# Altium PCB CustomTP4056Module_SMD.PcbDoc
Units mil, origin at the board's own origin, x right, y up, seen from the top; angles counter-clockwise.
Board outline 6000 x 4000 mil, 2 copper layers (Top Layer, Bottom Layer); 13 components, 10 nets, 33 pads, 3 vias.
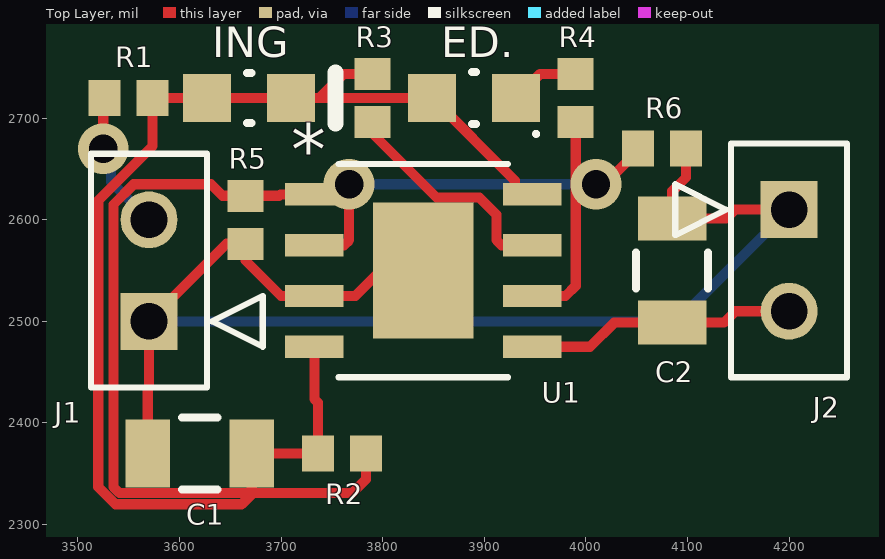
[diagram p0: Top Layer view]
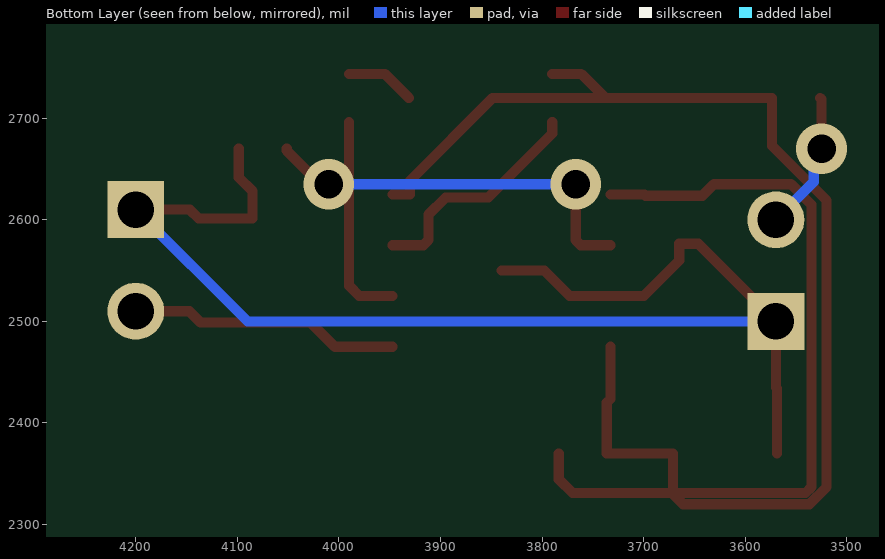
[diagram p1: Bottom Layer view, seen from below]

## Layer stack, top to bottom
Top Solder: solder mask 0.4, Solder Resist, Dk 3.5
Top Layer: signal copper 1.4
Dielectric 1: dielectric 12.6, FR-4, Dk 4.8
Bottom Layer: signal copper 1.4
Bottom Solder: solder mask 0.4, Solder Resist, Dk 3.5

## Board outline
1000,1000 7000,1000 7000,5000 1000,5000

## Design rules (kind name [scope] priority, off if disabled: settings)
AssemblyTestPointUsage [All] p1 off:
AssemblyTestpoint [All] p1 off: testpointundercomponent=TRUE minsize=40 maxsize=100 preferedsize=60 minholesize=0 maxholesize=40 preferedholesize=32 testpointgrid=1 usegrid=TRUE gridtolerance=0.01 allowsidetop=TRUE allowsidebottom=TRUE
Clearance [All] p1 off: gap=0 ignorepadtopadclearanceinfootprint=TRUE
Clearance Clearance_1_1 [OnMid vs OnMid] p2: gap=5 ignorepadtopadclearanceinfootprint=FALSE sourcerule=38 cellrowname=All cellrowtype=0 cellcolname=All cellcoltype=0 innerlayers=TRUE
Clearance Clearance_1_2 [(ExistsOnLayer('Top Layer') Or ExistsOnLayer('Bottom Layer')) vs (ExistsOnLayer('Top Layer') Or ExistsOnLayer('Bottom Layer'))] p3: gap=5 ignorepadtopadclearanceinfootprint=FALSE sourcerule=38 cellrowname=All cellrowtype=0 cellcolname=All cellcoltype=0 outerlayers=TRUE
Clearance Clearance_1 [All] p4 off: gap=10 ignorepadtopadclearanceinfootprint=FALSE ismatrix=TRUE
ComponentClearance [All] p1 off: gap=10 collisioncheckmode=3 verticalgap=10 showdistances=FALSE
DiffPairsRouting [All] p1 off: maxlimit=10 minlimit=10 mostfreqgap=10 toplayer_minwidth=15 toplayer_maxwidth=15 toplayer_prefwidth=15 bottomlayer_minwidth=15 bottomlayer_maxwidth=15 bottomlayer_prefwidth=15 maxuncoupledlength=500
FabricationTestPointUsage [All] p1 off: valid=0 allowmultiple=FALSE
FabricationTestpoint [All] p1 off: side=3 testpointundercomponent=TRUE minsize=40 maxsize=100 preferedsize=60 minholesize=0 maxholesize=40 preferedholesize=32 testpointgrid=1 allowsidetop=TRUE allowsidebottom=TRUE usegrid=TRUE gridtolerance=0.01
FanoutControl Fanout_BGA [IsBGA] p1 off: bgadir=Out bgaviamode=Centered fanoutstyle=Auto fanoutdirection=Alternating viagrid=1 // Fanout_BGA (Default Rule)
FanoutControl Fanout_LCC [IsLCC] p2 off: bgadir=Out bgaviamode=Centered fanoutstyle=Auto fanoutdirection=Alternating viagrid=1 // Fanout_LCC (Default Rule)
FanoutControl Fanout_SOIC [IsSOIC] p3 off: bgadir=Out bgaviamode=Centered fanoutstyle=Auto fanoutdirection=Alternating viagrid=1 // Fanout_SOIC (Default Rule)
FanoutControl Fanout_Small [(CompPinCount < 5)] p4 off: bgadir=Out bgaviamode=Centered fanoutstyle=Auto fanoutdirection=OutThenIn viagrid=1 // Fanout_Small (Default Rule)
FanoutControl Fanout_Default [All] p5 off: bgadir=Out bgaviamode=Centered fanoutstyle=Auto fanoutdirection=Alternating viagrid=1 // Fanout_Default (Default Rule)
Height [All] p1 off: minheight=0 maxheight=1000 prefheight=500
HoleSize HoleSize_1 [All] p1: absolutevalues=TRUE maxlimit=10 minlimit=1 maxpercent=80.000 minpercent=20.000
HoleSize [All] p2 off: absolutevalues=TRUE maxlimit=100 minlimit=1 maxpercent=80.000 minpercent=20.000
HoleToHoleClearance [All] p1 off: gap=10 allowstackedmicrovias=TRUE
LayerPairs [All] p1 off: enforce=TRUE
MinimumSolderMaskSliver [All] p1 off: minsoldermaskwidth=10
NetAntennae [All] p1 off: netantennaetolerance=0
PasteMaskExpansion [All] p1 off: expansion=0
PlaneClearance [All] p1 off: clearance=20
PlaneConnect [All] p1 off: planeconnectstyle=Relief reliefexpansion=20 reliefentries=4 reliefconductorwidth=10 reliefairgap=10
PolygonConnect [All] p1 off: connectstyle=Relief reliefconductorwidth=10 reliefentries=4 polygonreliefangle="90 Angle" airgapwidth=10
RoutingCorners [All] p1 off: cornerstyle=45-Degree minsetback=100 maxsetback=100
RoutingLayers [All] p1 off: top layer_v5=TRUE bottom layer_v5=TRUE
RoutingPriority [All] p1 off: routingpriority=0
RoutingTopology [All] p1 off: topology=Shortest
RoutingVias [All] p1 off: holewidth=28 width=50 viastyle="Through Hole" minholewidth=28 minwidth=50 maxholewidth=28 maxwidth=50
ShortCircuit [All] p1 off: allowed=FALSE
SilkToSilkClearance [All] p1 off: silktosilkclearance=10
SilkToSolderMaskClearance [IsPad] p1 off: minsilkscreentomaskgap=10 clearancetoexposedcopper=TRUE
SolderMaskExpansion [All] p1 off: expansion=4 istentingtop=FALSE
UnRoutedNet [All] p1 off:
UnpouredPolygon [All] p1 off:
Width [All] p1 off: maxlimit=10 minlimit=10 preferedwidth=10
1 further rules are at their usual default settings.

## Components (designator, comment, footprint, x,y, rotation, side; value= is the part's Value field where it differs from the comment)
C1 "1206ZC106KAT2A" FP-1206-L_3_2_0_2-W_1_6_0-IPC_C 3620,2370 r180 top
C2 "1206ZC106KAT2A" FP-1206-L_3_2_0_2-W_1_6_0-IPC_C 4085,2550 r90 top
ED. "LTST-C170KGKT" LTST-LTST-C170KGKT-2_V 3890,2720 r180 top (schematic designator DS2)
ING "LTST-C170KRKT" LTST-C170KRKT_V 3668.66,2720 r0 top (schematic designator DS1)
J1 "Connector" CONN_M20-99902_HRW 3570,2500 r270 top
J2 "Connector" CONN_M20-99902_HRW 4200,2610 r90 top
R1 "ERA3AEB221V" RESC1608X55X30LL20T20 3550,2720 r0 top
R2 "ERA3AEB221V" RESC1608X55X30LL20T20 3760,2370 r180 top
R3 "ERA3AEB221V" RESC1608X55X30LL20T20 3790,2720 r90 top
R4 "ERA3AEB221V" RESC1608X55X30LL20T20 3990,2720 r90 top
R5 "ERA3AEB221V" RESC1608X55X30LL20T20 3665,2600 r90 top
R6 "ERA3AEB221V" RESC1608X55X30LL20T20 4075,2670 r0 top
U1 "TP4056" ESOP8_TPW 3840,2550 r0 top

## Footprints (in the part's own frame and the unit in brackets; to place one, negate y for a bottom-side part, rotate by r counter-clockwise, add the part's x,y. Pads: shape width x height; smd on the part's side, far side on the other; paste and mask are expansions set on the pad)
CONN_M20-99902_HRW [mil]
  rect 56x56 / inner round 60 / far side rect 56x56 hole 36 paste-99999 mask+0: 1(0,0)
  round 56 / inner round 60 / far side round 56 hole 36 paste-99999 mask+0: 2(-100,0)
  silkscreen extent -165,-57 65,112, body extent -150,-492 50,13, height 100
ESOP8_TPW [mil]
  rect 57.5x22 smd paste+0 mask+0: 1(-107.25,75) 2(-107.25,25) 3(-107.25,-25) 4(-107.25,-75) 5(107.25,-75) 6(107.25,-25) 7(107.25,25) 8(107.25,75)
  rect 99x134 smd paste-66.5 mask+0: 9(0,0)
  silkscreen extent -84,-105 84,105, body extent -122,-100 122,100, height 69
FP-1206-L_3_2_0_2-W_1_6_0-IPC_C [mil]
  rect 43.49x67.17 smd paste+0 mask+0: 1(-51.21,0) 2(51.21,0)
  silkscreen extent -18,-35 18,35, body extent -77,-39 77,39, height 10
LTST-C170KRKT_V [mm] "SMD, 2-Leads, Body 2x1.25mm"
  rect 1.2x1.2 smd: 1(-1.05,0) 2(1.05,0)
  silkscreen extent -0.05,-0.64 2.16,0.64, body extent -1,-0.63 1,0.63, height 1.2
LTST-LTST-C170KGKT-2_V [mm] "SMD, 2-Leads, Body 2.00x1.25mm"
  rect 1.2x1.2 smd: 1(-1.05,0) 2(1.05,0)
  silkscreen extent -1.6,-0.65 0.05,0.95, body extent -1,-0.63 1,0.63, height 1.1
RESC1608X55X30LL20T20 [mm] "Chip Resistor, 2-Leads, Body 1.60x0.80mm, IPC High Density"
  rect 0.8x0.9 smd: 1(-0.6,0) 2(0.6,0)
  body extent -0.9,-0.5 0.9,0.5, height 0.55

## Part data
C1 C2: library part CMP-04427-011061-1, "General Purpose Ceramic Capacitor, 1206, 10uF, 10%, X7R, 15%, 10V", Capacitance=10uF, Case Code (Imperial)=1206, Case Code (Metric)=3216, Dielectric=X7R, Max Operating Temperature=125°C, Min Operating Temperature=-55°C, Package Quantity=1, Tolerance=10%, Voltage=10V, Case/Package=1206, Construction=Flat, Contact Plating=Tin, Depth=1.6mm, Dissipation Factor=5%, Height=1.78mm, Lead Free="Lead Free", Length=3.2mm, Mount="Surface Mount", Number of Pins=2, Packaging="Tape and Reel", Radiation Hardening=No, REACH SVHC="No SVHC", RoHS Compliant=Yes, Series=-, Termination=SMD/SMT, Thickness=0.07inch, Voltage Rating=10V, Voltage Rating (DC)=10V, Width=0.063inch
ED.: library part CMP-2000-06620-1, "Ultra Bright AlInGaP Chip LED, 75 mW, -55 to 85 degC, 2-Pin SMD (0805), RoHS, Tape and Reel", Emitting Color=YellowGreen, Forward Current=30mA, Forward Voltage=2.4V, Manufacturer=Lite-On, Operating Temp Range=-55Cto85C, Operating Temperature Classification=Industrial, Package Description="2-Pin Surface Mounted Device, Body 2 x 1.25 mm", Package Reference=LTST-C170KGKT-2, Package Type=ChipLed, Power Dissipation=75W, Power Dissipation Max=75mW, Reverse Voltage=5V, Test Current (It)=20mA, Chip Material=AlGaInP, Datasheet URL=http://optoelectronics.liteon.com/upload/download/DS22-2000-073/S_110_LTST-C170KGKT.pdf, Datasheet Version="Rev. G, 06/2005", DELETED=Compliant, Dominant Wave Length=571nm, Forward Current Max=30mA, High Brightness=Yes, Lens Dimensions=1.4x1.25x0.6mm, Lum Intensity=35mcd, Luminous Intensity=35mcd, Main Category=ChipLED, Manufacturer URL=http://www.us.liteon.com/, Mounting=SurfaceMount, Mounting Technology=SurfaceMount, Number of  Elements=1, Packaging=TapeandReel, Peak Wavelength=574nm, Pin Count=2, Product Depth (mm)=1.25mm, Product Height (mm)=1.1mm, Product Length (mm)=2mm, Rad Hardened=No, Shape Type=Rectangular, Type=Uni-Color, Viewing Angle=130deg
ING: library part CMP-2000-07593-1, "LED Red, 75 mW, 54 mcd, -55 to 85 degC, 2-Pin SMD, RoHS, Tape and Reel", Case Code (Imperial)=0805, Case Code (Metric)=2012, Colour=Red, Forward Current=30mA, Forward Voltage=2V, Lens Colour=Colorless, Manufacturer=Lite-On, Max Operating Temperature=85degC, Min Operating Temperature=-55degC, Package Description="2-Pin Surface Mount Device, Body 2 x 1.25 mm", Package Quantity=1, Package Reference=C170KRKT, Power Dissipation=75mW, Test Current=20mA, Case\/Package=0805, Datasheet URL=http://optoelectronics.liteon.com/upload/download/DS-22-99-0150/LTST-C170KRKT.pdf, Datasheet Version="Rev. D, 11/2014", Depth=1.6mm, Dominant Wavelength=631nm, Height=1.1mm, Illumination Colour=Red, Lead Free=LeadFree, Length=3.2mm, Lens Style=Rectangular, Lens Transparency=Clear, Luminous Intensity=54mcd, Manufacturer URL=http://www.us.liteon.com/, Mount=SurfaceMount, Mounting Technology=SurfaceMount, Number of Elements=1, Number of LEDs=1, Number of Pins=2, Packaging=TapeandReel, Power Rating=75mW, Radiation Hardening=No, RoHSCompliant=True, Viewing Angle=130degrees, Wavelength=639nm, Width=1.25mm
J1 J2: library part M20-9990245, "No Description Available", Mfr_Name=Harwin, RefDes=RefDes, Type=Type
R1 R2 R3 R4 R5 R6: library part CMP-2000-00954-1, Manufacturer=Panasonic, Part Number=ERA3AEB221V
U1: "No Description Available", Mfr_Name=TOPPOWER, RefDes=RefDes, Type=Type

## Via types
v1: diameter 50, hole 28, Top Layer to Bottom Layer, 3 vias

## Nets (pads, with @x,y where several pads share a name; then routed paths per layer and width w, separated by ;. In a path a pad name is that pad's centre, name@x,y a point inside that pad or via, vN(x,y) a via of type N, cw(c..) or ccw(c..) an arc to the next point about the centre after c; other vN are vias at no path point)
BAT+: C2.1 J2.2 U1.5 | length 267.2
  Top Layer w10: U1.5 4004,2475 4027.79,2498.79 C2.1 4136,2498.79 4147.21,2510 J2.2
GND: C1.2 C2.2 J1.1 J2.1 R5.1 R6.2 U1.3 U1.9 | length 1342
  Top Layer w10: C1.2 3568.79,2434 3570,2435.21 J1.1 3646.38,2576.38 R5.1 3665,2560 3700,2525 U1.3 3773,2525 3798,2550 U1.9 ; R6.2 4098.62,2641.62 4085,2628 C2.2 4138,2601.21 4146.79,2610 J2.1
  Bottom Layer w10: J1.1 4090,2500 J2.1
IN+: J1.2 R1.1 | length 139.2
  Top Layer w10: v1(3525,2670) 3525,2718.62 R1.1
  Bottom Layer w10: v1(3525,2670) 3532.65,2662.35 3532.65,2637.35 J1.2
NetC1_1: C1.1 ED..2 ING.1 R1.2 R2.2 U1.4 U1.8 | length 1200.3
  Top Layer w10: U1.4 3732.75,2423.63 3736.38,2420 R2.2 C1.1 3671.21,2330 3661.21,2320 3537,2320 3520,2337 3520,2619 3573.62,2672.62 R1.2 ING.1 ED..2 3930,2638.66 3930,2625 U1.8
NetDS1_2: ING.2 R3.2 | length 89.8
  Top Layer w10: ING.2 3738,2720 3761.62,2743.62 R3.2
NetDS2_1: ED..1 R4.2 | length 68.4
  Top Layer w10: ED..1 3954.96,2743.62 R4.2
NetR2_1: R2.1 R5.2 U1.1 | length 771.5
  Top Layer w10: U1.1 3699.38,2625 3698,2623.62 R5.2 3642.38,2623.62 3631,2635 3555,2635 3535,2615 3535,2336.86 3540.86,2331 3770,2331 3783.62,2344.62 R2.1
NetR3_1: R3.1 U1.7 | length 228.8
  Top Layer w10: R3.1 3790,2685 3853,2622 3895,2622 3912,2605 3912,2580 3917,2575 U1.7
NetR4_1: R4.1 U1.6 | length 208.3
  Top Layer w10: U1.6 3980,2525 3990,2535 R4.1
NetR6_1: R6.1 U1.2 | length 391.3
  Top Layer w10: U1.2 3762,2575 3767,2580 v1(3767,2635) ; v1(4010,2635) 4018.35,2635 4051.38,2668.03 R6.1
  Bottom Layer w10: v1(3767,2635) v1(4010,2635)

## Text inside footprints (layer, text, board x,y; h text height)
U1: Top 3D Body "*" at 3764,2597 h50; Top Overlay "*" at 3710,2645 h50